# Altium PCB F73-M-V1.0.PcbDoc (part 2 of 2)
Units mm, origin at the board's own origin, x right, y up, seen from the top; angles counter-clockwise.
Board outline 236.42 x 127.48 mm, 3 copper layers (Top Layer, Internal Plane 2, Bottom Layer); 173 components, 127 nets, 549 pads, 601 vias.
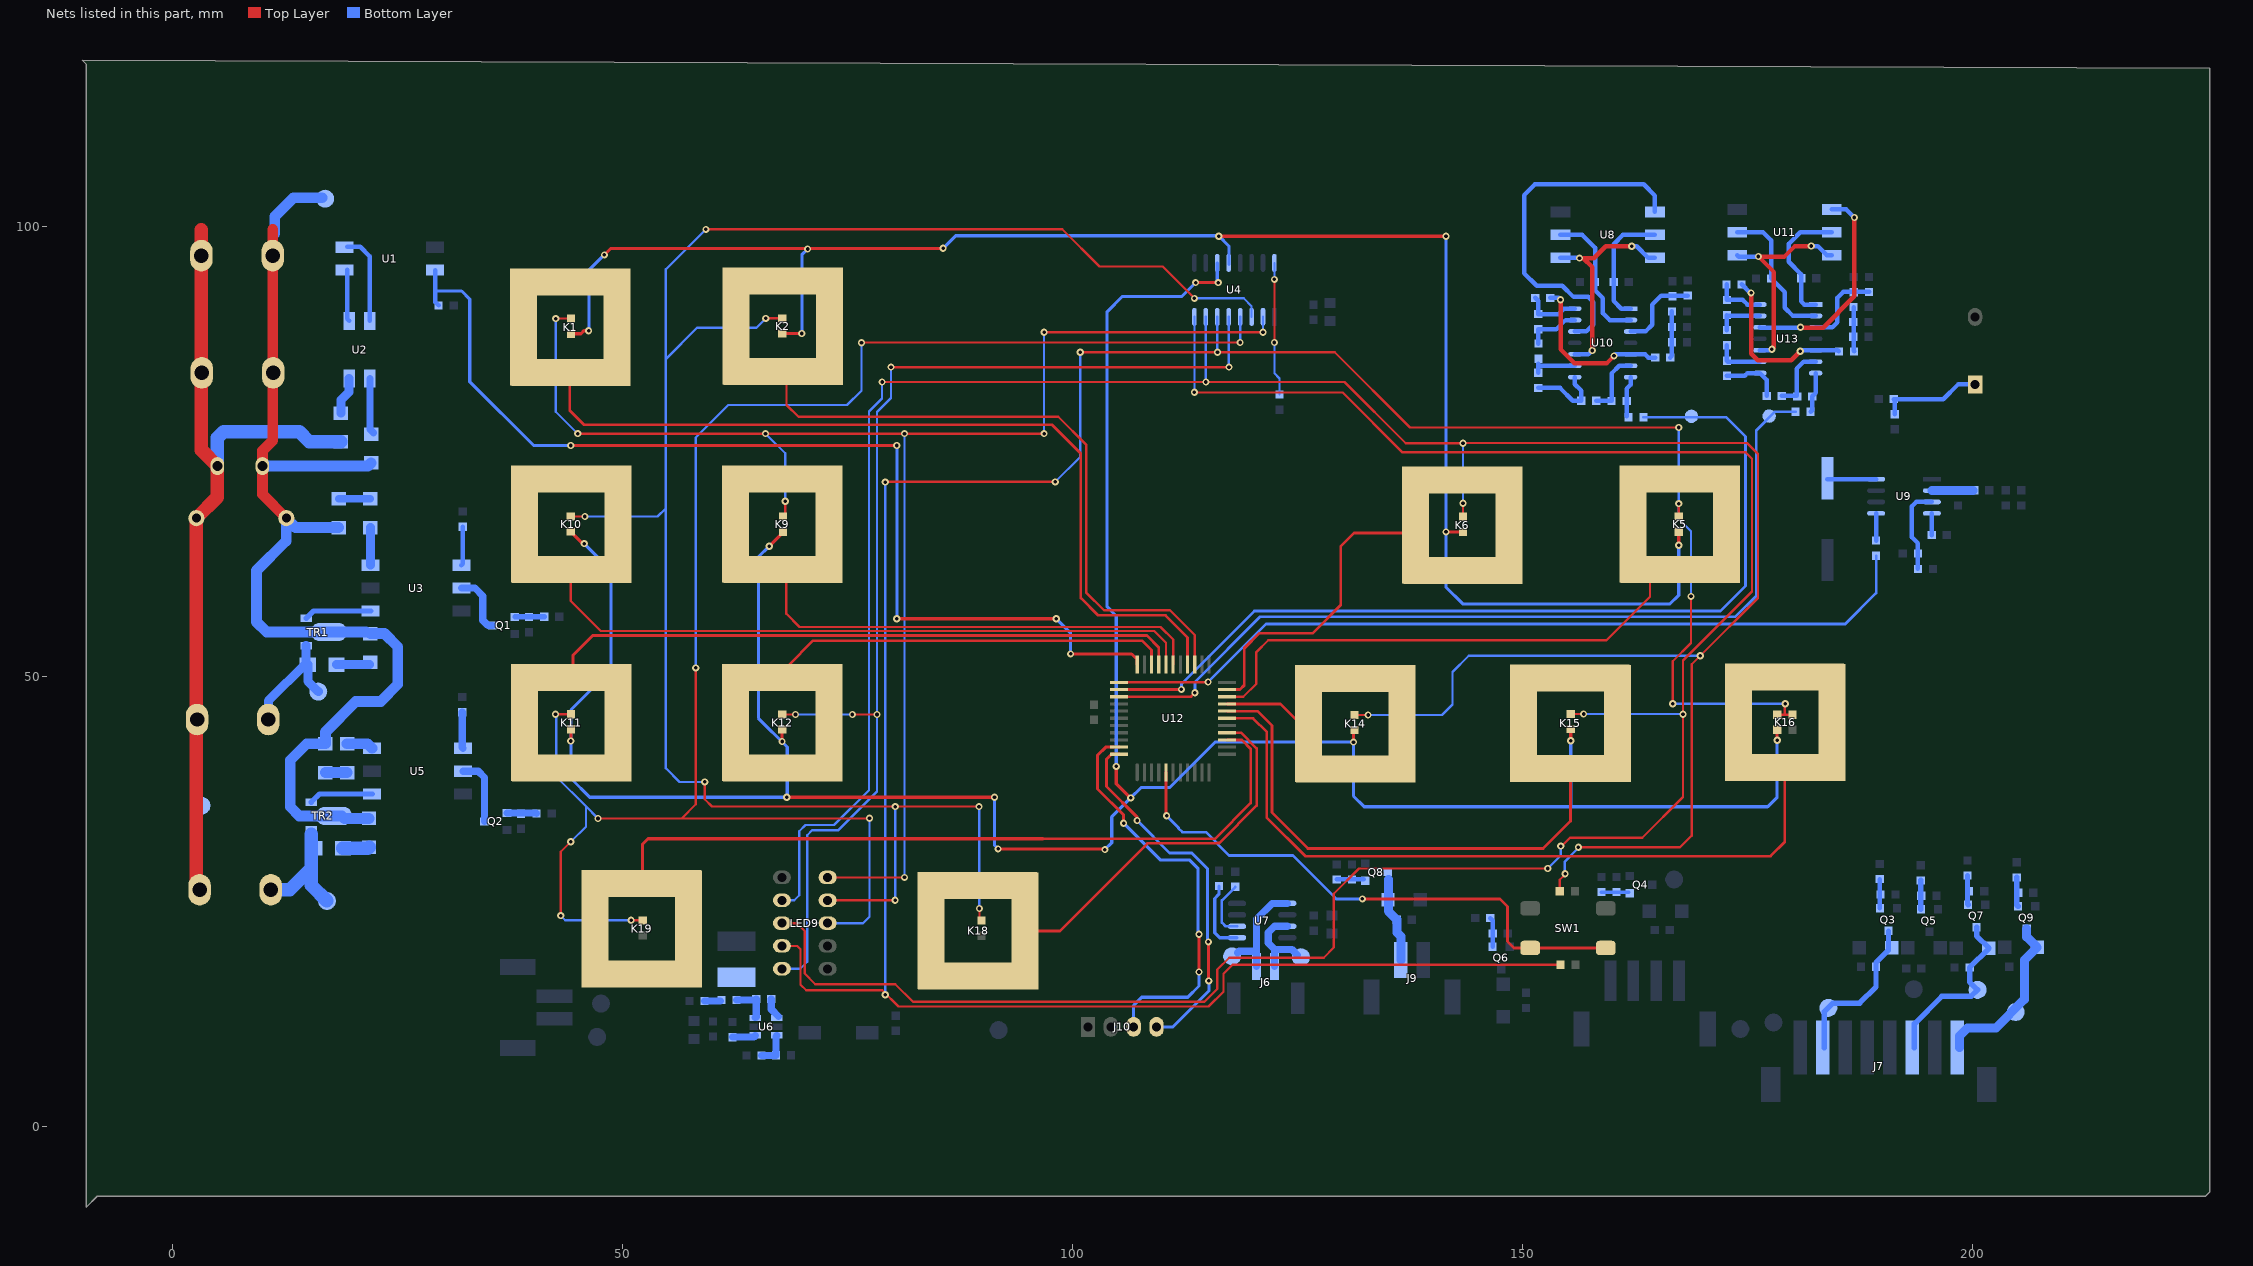
[diagram p3: the nets of this part, all layers, seen from the top]

## Via types
v1: diameter 0.8, hole 0.4, Top Layer to Bottom Layer, tented both sides, 601 vias

## Nets (pads, with @x,y where several pads share a name; then routed paths per layer and width w, separated by ;. In a path a pad name is that pad's centre, name@x,y a point inside that pad or via, vN(x,y) a via of type N, cw(c..) or ccw(c..) an arc to the next point about the centre after c; other vN are vias at no path point) (continued)
GRID4: LED1.2 LED2.2 LED5.2 LED6.2 U4.12 | length 196.2
  Top Layer w0.35: LED1.2@44.257,88.098 45.375,88.098 45.695,88.417 v1(46.228,88.417) ; v1(47.981,96.85) 48.692,97.561 v1@70.561,97.561 ; LED2.2@67.76,88.124 v1(69.915,88.124) ; v1(70.561,97.511) v1@70.561,97.561 ; v1@85.623,97.561 v1@70.561,97.561 ; v1(116.256,98.933) v1(141.529,98.933) ; v1(141.529,66.065) LED6.2@143.408,66.065 ; v1(167.386,64.592) LED5.2@167.386,66.091
  Bottom Layer w0.35: v1@46.279,88.417 46.279,95.199 v1@47.955,96.876 ; v1@69.926,88.124 69.926,96.876 v1(70.561,97.511) ; v1(85.623,97.587) 87.02,98.984 116.256,98.984 117.409,97.83 U4.12@117.409,95.82 ; v1(141.529,98.933) 141.529,59.919 143.383,58.064 166.421,58.064 167.386,59.03 v1(167.386,64.592)
GRID5: LED10.2 LED11.2 LED12.2 LED13.2 LED15.2 LED16.2 LED17.2 U4.11 | length 312.5
  Top Layer w0.35: LED11.2@44.232,66.102 45.564,64.77 v1(45.745,64.77) ; v1@44.257,42.824 LED12.2@44.257,44.131 ; v1(66.294,64.465) 67.818,65.989 LED10.2@67.818,66.091 ; v1(67.735,42.774) LED13.2@67.735,44.105 ; v1(68.25,36.576) v1(91.338,36.576) ; v1(91.745,30.836) 103.48,30.836 v1@103.607,30.709 ; v1(104.877,40.005) 104.877,38.075 106.477,36.474 v1(106.477,36.5) ; v1(113.69,93.777) v1(116.205,93.777) ; v1@131.242,42.875 131.242,43.942 LED15.2@131.343,44.044 ; v1(155.397,42.85) LED16.2@155.397,44.145 ; v1(178.333,42.901) LED17.2@178.333,44.069
  Bottom Layer w0.35: v1(45.745,64.77) 48.717,61.798 48.717,50.724 44.272,46.279 44.272,38.659 46.355,36.576 v1(68.25,36.576) ; v1(66.294,64.465) 65.1,63.271 65.1,45.364 68.301,42.164 v1@68.301,36.424 ; v1(91.338,36.576) 91.338,31.242 v1(91.745,30.836) ; v1(103.607,30.759) 104.369,31.521 104.369,34.392 v1(106.477,36.5) 107.62,37.643 110.795,37.643 115.849,42.697 v1(131.242,42.697) 131.242,36.703 132.436,35.509 151.232,35.509 ; v1(104.877,40.005) 104.877,56.718 103.861,57.734 103.861,90.551 105.537,92.227 112.152,92.227 v1@113.734,93.81 ; v1@116.103,93.878 U4.11@116.103,95.967 ; v1(155.397,42.85) 155.397,35.636 155.27,35.509 151.232,35.509 ; v1(178.333,42.901) 178.333,36.576 177.267,35.509 151.232,35.509
  other v1: 44.247,42.824
IR: R25.1 U12.34 | length 92.5
  Top Layer w0.3: U12.34@105.198,49.346 115.107,49.346 v1(115.076,49.378)
  Bottom Layer w0.3: v1(115.076,49.378) 121.527,55.829 185.903,55.829 189.332,59.258 R25.1@189.332,63.424
ISP_CK: J10.4 U12.44 | length 41
  Top Layer w0.35: U12.44@105.198,41.346 104.338,41.346 103.784,40.792 103.784,37.77 107.188,34.366 v1(107.188,33.985) ; v1(115.113,20.498) 115.138,20.472 v1@115.138,16.154
  Bottom Layer w0.35: v1(107.188,33.985) 110.795,30.378 113.259,30.378 115.011,28.626 v1@115.011,20.498 ; J10.4@109.347,11.049 111.176,11.049 115.164,15.037 v1(115.164,16.154)
ISP_DA: J10.3 U12.43 | length 45.6
  Top Layer w0.35: U12.43@105.198,42.146 103.69,42.146 102.794,41.25 102.794,37.49 105.689,34.595 v1(105.689,33.68) ; v1@114.071,17.094 v1(114.071,21.336)
  Bottom Layer w0.35: v1(105.689,33.68) 109.753,29.616 112.979,29.616 113.97,28.626 113.97,21.336 v1(114.071,21.336) ; J10.3@106.807,11.049 106.807,13.437 107.709,14.338 112.814,14.338 114.071,15.596 v1(114.071,17.145)
K1: K1.2 U12.26 | length 94.7
  Top Layer w0.3: K1.2@44.142,82.782 44.142,79.531 45.695,77.978 97.714,77.978 100.94,74.752 100.94,58.725 102.87,56.794 110.338,56.794 112.799,54.333 U12.26@112.799,51.346
K2: K2.2 U12.25 | length 71.6
  Top Layer w0.254: K2.2@68.232,82.91 68.232,80.181 69.545,78.867 98.425,78.867 101.524,75.768 101.524,59.329 103.499,57.353 110.846,57.353 113.599,54.6 U12.25@113.599,51.346
K5: K5.2 U12.20 | length 55.7
  Top Layer w0.254: U12.20@117.199,47.746 118.993,47.746 120.447,49.2 120.447,52.705 121.768,54.026 159.36,54.026 164.193,58.859 K5.2@164.193,60.889
K6: K6.2 U12.21 | length 33.5
  Top Layer w0.3: U12.21@117.199,48.546 118.625,48.546 119.101,49.022 119.101,53.137 120.777,54.813 126.721,54.813 129.819,57.912 129.819,64.465 131.297,65.943 K6.2@137.25,65.943
K9: K9.2 U12.28 | length 50.9
  Top Layer w0.254: K9.2@68.206,60.889 68.206,56.965 69.672,55.499 109.804,55.499 111.199,54.105 U12.28@111.199,51.346
K10: K10.2 U12.29 | length 73
  Top Layer w0.254: K10.2@44.229,60.889 44.229,58.387 47.574,55.042 109.093,55.042 110.399,53.736 U12.29@110.399,51.346
K11: K11.2 U12.30 | length 71.9
  Top Layer w0.3: K11.2@44.483,48.893 44.483,52.357 46.685,54.559 108.28,54.559 109.599,53.241 U12.30@109.599,51.346
K12: K12.2 U12.31 | length 45.9
  Top Layer w0.3: K12.2@68.435,48.893 68.435,51.239 71.171,53.975 107.747,53.975 108.799,52.923 U12.31@108.799,51.346
K14: K14.2 U12.19 | length 10.2
  Top Layer w0.3: U12.19@117.199,46.946 121.583,46.946 123.125,46.946 K14.2@126.15,43.921
K15: K15.2 U12.18 | length 56.4
  Top Layer w0.3: U12.18@117.199,46.146 120.579,46.146 122.174,44.552 122.174,34.874 126.162,30.886 152.324,30.886 155.354,33.916 K15.2@155.354,38.918
K16: K16.2 U12.17 | length 81.8
  Top Layer w0.3: U12.17@117.199,45.346 120.084,45.346 121.615,43.815 121.615,34.29 125.882,30.023 177.597,30.023 179.179,31.605 K16.2@179.179,38.892
K18: K18.2 U12.15 | length 41.9
  Top Layer w0.3: K18.2@94.713,21.714 98.6,21.714 108.339,31.453 116.031,31.453 116.074,31.496 116.332,31.496 120.472,35.636 120.472,42.012 118.738,43.746 U12.15@117.199,43.746
K19: K19.2 U12.14 | length 82.9
  Top Layer w0.3: 96.749,31.953 115.824,31.953 119.812,35.941 119.812,41.961 118.826,42.946 U12.14@117.199,42.946
  Top Layer w0.35: K19.2@52.2,26.997 52.2,31.321 52.832,31.953 96.749,31.953
L: J1.1 J2.2 pad.4 R3.2 R4.2 R13.2 R66.1 R67.1 TC1.2 TR1.2 TR2.2 VDR1.1 | length 124.2
  Top Layer w1.2: 11.108,99.67 J2.2@11.108,96.776 11.108,76.233 9.968,75.093 VDR1.1@9.968,73.381 9.968,70.242 TC1.2@12.62,67.589
  Bottom Layer w1.2: VDR1.1@9.968,73.381 21.691,73.381 R3.2@22.047,73.737 ; 11.328,99.238 11.328,101.117 13.411,103.2 pad.4@16.586,103.2 ; R4.2@18.44,66.548 13.661,66.548 TC1.2@12.62,67.589 12.62,65.071 9.322,61.773 9.322,56.058 10.439,54.94 TR1.2@14.834,54.94 17.371,54.94 TR1.2@17.374,54.938 R66.1@21.452,54.938 ; R67.1@21.819,34.214 19.075,34.214 18.796,34.493 TR2.2@15.392,34.493 14.072,34.493 13.056,35.509 13.056,40.691 14.884,42.519 R13.2@16.967,42.519 16.967,43.84 20.345,47.219 23.114,47.219 25.019,49.124 25.019,53.289 23.546,54.762 R66.1@21.971,54.762
LEFT: C19.2 D5.1 J7.6 pad.16@200.609,15.164 Q7.C | length 20
  Bottom Layer w0.6: J7.6@193.577,8.738 193.577,11.382 196.647,14.453 199.898,14.453 pad.16@200.609,15.164 199.731,16.042 C19.2@199.731,17.655 201.854,19.778 D5.1@201.854,19.812 200.508,21.158 Q7.C@200.508,22.143
LEG: C16.2 D1.1 J7.2 pad.16@184.023,13.157 Q3.C | length 17.7
  Bottom Layer w0.6: J7.2@183.577,8.738 183.577,12.736 184.531,13.691 187.503,13.691 189.317,15.505 C16.2@189.317,17.731 189.317,18.197 190.703,19.583 Q3.C@190.703,21.712
N: J1.2 J2.1 J3.2 J4.2 pad.3 R1.2 TC1.1 VDR1.2 | length 92.8
  Top Layer w1.5: J4.2@2.985,26.291 2.62,26.655 TC1.1@2.62,67.589 4.968,69.937 VDR1.2@4.968,73.381 3.188,75.16 3.188,99.644
  Bottom Layer w1.5: VDR1.2@4.968,73.381 4.968,76.519 5.664,77.216 14.046,77.216 15.189,76.073 R1.2@18.694,76.073
NetBUZZ1_2: BUZZ1.2 R18.1 R21.1 | length 11.4
  Bottom Layer w0.5: R21.1@191.4,79.148 191.4,80.723 R18.1@191.298,80.824 196.801,80.824 198.434,82.458 BUZZ1.2@200.33,82.458
NetC5_1: C5.1 U6.1 | length 2.3
  Bottom Layer w0.8: C5.1@66.533,14.149 66.533,13.015 U6.1@67.335,12.213
NetC5_2: C5.2 L1.1 R24.2 U6.6 | length 4.3
  Bottom Layer w0.8: R24.2@62.672,14.048 64.755,14.048 C5.2@64.857,14.149 64.857,12.184 U6.6@64.749,12.076
NetC6_1: C6.1 R23.2 U9.3 | length 9.6
  Bottom Layer w0.5: R23.2@193.98,61.951 C6.1@193.98,63.652 193.98,64.821 193.319,65.481 193.319,68.91 193.802,69.393 U9.3@195.529,69.393
NetC7_2: C7.2 R24.1 | length 1.8
  Bottom Layer w0.8: C7.2@59.116,13.921 R24.1@60.869,13.921
NetC11_2: C11.2 L2.2 U9.2 | length 4.6
  Bottom Layer w1: U9.2@195.529,70.663 C11.2@200.101,70.663
NetC12_2: C12.2 U8.2 U10.1 | length 13.6
  Bottom Layer w0.5: U10.1@162.037,90.883 161.009,90.883 160.158,91.734 C12.2@160.158,93.829 160.158,98.055 161.188,99.085 U8.2@164.744,99.085
NetC14_1: C14.1 U9.4 | length 2.4
  Bottom Layer w0.5: C14.1@195.504,65.71 195.504,68.097 U9.4@195.529,68.123
NetC15_2: C15.2 R30.2 R34.2 R38.1 | length 5.2
  Bottom Layer w0.5: R34.2@166.457,85.447 166.635,85.625 C15.2@166.635,87.149 R38.1@166.635,88.851 R30.2@166.635,90.578
NetC17_2: C17.2 U11.2 U13.1 | length 14
  Bottom Layer w0.5: U13.1@182.611,91.34 181.354,91.34 181.011,91.683 C17.2@181.011,94.261 181.011,94.681 179.603,96.088 179.603,98.069 180.899,99.365 U11.2@184.404,99.365
NetC20_2: C20.2 D7.1 J9.1 Q8.C | length 9.5
  Bottom Layer w1: 135.113,27.403 135.113,23.903 C20.2@136.053,22.963 136.053,21.559 136.505,21.107 J9.1@136.505,18.485
NetC25_2: C25.2 R51.2 R54.2 R58.1 | length 4.9
  Bottom Layer w0.5: R51.2@186.828,91.061 186.828,86.184 R54.2@186.878,86.133
NetC26_1: C26.1 R66.2 | length 3.7
  Bottom Layer w1: C26.1@18.212,51.308 R66.2@21.882,51.308
NetC26_2: C26.2 J3.1 pad.6 TR1.1 | length 13.4
  Bottom Layer w1: J3.1@10.625,45.214 10.625,47.278 14.834,51.486 TR1.1@14.834,53.416 ; C26.2@15.012,51.308 15.012,49.479 pad.6@16.18,48.311
NetC27_1: C27.1 R67.2 | length 2.9
  Bottom Layer w1.5: C27.1@18.923,30.886 21.691,30.886 R67.2@21.819,31.014
NetC27_2: C27.2 J4.1 pad.5 TR2.1 | length 13.6
  Bottom Layer w1.5: J4.1@10.905,26.291 13.006,26.291 15.392,28.677 ; 15.392,32.436 15.392,28.677 ; pad.5@17.145,25.044 15.392,26.797 15.392,28.677
NetJ6_1: J6.1 pad.8 U7.5 | length 11.6
  Bottom Layer w0.8: pad.8@118.364,19.279 118.542,19.456 120.474,19.456 ; J6.1@120.474,17.759 120.474,19.456 ; U7.5@123.886,24.767 122.201,24.767 120.474,23.039 120.474,19.456
NetJ6_2: J6.2 pad.9 U7.7 | length 9.3
  Bottom Layer w0.8: J6.2@122.474,17.759 122.474,19.665 ; U7.7@123.886,22.227 122.455,22.227 121.768,21.539 121.768,20.371 122.474,19.665 ; pad.9@124.993,19.05 124.379,19.665 122.474,19.665
NetQ1_B: Q1.B R7.1 R9.2 | length 3.3
  Bottom Layer w0.6: Q1.B@38.04,56.628 41.27,56.628 R9.2@41.286,56.644
NetQ1_C: Q1.C U3.2 | length 6.8
  Bottom Layer w0.8: U3.2@32.091,59.819 33.603,59.819 34.468,58.953 34.468,56.236 35.025,55.678 Q1.C@35.54,55.678
NetQ2_B: Q2.B R15.1 R16.2 | length 3.3
  Bottom Layer w0.8: Q2.B@37.151,34.835 40.386,34.835 R16.2@40.447,34.774
NetQ2_C: Q2.C U5.2 | length 7.6
  Bottom Layer w0.8: U5.2@32.258,39.472 33.96,39.472 34.651,38.781 Q2.C@34.651,33.885
NetQ3_B: Q3.B R27.1 R33.1 | length 3.3
  Bottom Layer w0.5: R33.1@189.738,27.483 189.738,24.227 Q3.B@189.753,24.212
NetQ4_B: Q4.B R32.1 R35.1 | length 3
  Bottom Layer w0.4: R35.1@158.801,26.035 R32.1@160.477,26.035 Q4.B@161.808,26.035
NetQ5_B: Q5.B R40.1 R44.2 | length 3.2
  Bottom Layer w0.6: R44.2@194.285,27.33 194.285,24.125 Q5.B@194.3,24.11
NetQ6_B: Q6.B R42.1 R46.1 | length 3.3
  Bottom Layer w0.5: R46.1@146.442,23.141 146.711,22.872 Q6.B@146.711,19.971
NetQ7_B: Q7.B R50.1 R53.2 | length 3.2
  Bottom Layer w0.6: R53.2@199.492,27.864 199.492,24.709 Q7.B@199.558,24.643
NetQ8_B: Q8.B R55.1 R60.1 | length 3
  Bottom Layer w0.5: R60.1@129.388,27.432 R55.1@131.064,27.432 Q8.B@132.395,27.432
NetQ9_B: Q9.B R61.1 R64.2 | length 3.3
  Bottom Layer w0.6: R64.2@204.953,27.661 204.953,24.608 Q9.B@205.12,24.44
NetR1_1: R1.1 U2.AC2 | length 4.2
  Bottom Layer w1: R1.1@18.694,79.273 18.694,80.721 19.612,81.639 U2.AC2@19.612,83.111
NetR3_1: R3.1 U2.AC1 | length 6.2
  Bottom Layer w0.8: U2.AC1@21.912,83.111 21.912,77.478 R3.1@22.301,77.089
NetR4_1: R4.1 R5.1 | length 3.5
  Bottom Layer w0.8: R4.1@18.44,69.748 R5.1@21.971,69.748
NetR5_2: R5.2 U3.6 | length 4.2
  Bottom Layer w1: U3.6@21.971,62.378 R5.2@21.971,66.548
NetR6_2: R6.2 U3.1 | length 4.4
  Bottom Layer w0.5: U3.1@32.091,62.359 32.243,62.511 R6.2@32.243,66.651
NetR8_2: R8.2 U4.16 | length 14.9
  Top Layer w0.254: v1(122.453,87.122) v1(122.453,94.132)
  Bottom Layer w0.254: v1@122.453,87.198 122.453,83.693 123.023,83.124 R8.2@123.023,81.332 ; v1(122.453,94.132) U4.16@122.453,95.967
NetR12_1: R12.1 R13.1 | length 2.4
  Bottom Layer w1.2: R13.1@16.967,39.319 R12.1@19.38,39.319
NetR12_2: R12.2 U5.6 | length 3
  Bottom Layer w1.2: R12.2@19.38,42.519 21.65,42.519 U5.6@22.158,42.012
NetR14_2: R14.2 U5.1 | length 4
  Bottom Layer w0.8: R14.2@32.182,46.025 32.182,42.088 U5.1@32.258,42.012
NetR17_1: R17.1 R20.2 U6.3 | length 3.8
  Bottom Layer w0.8: R17.1@65.441,7.876 67.016,7.876 R20.2@67.041,7.901 67.041,9.981 U6.3@67.135,10.076
NetR19_2: R19.2 U6.4 | length 2.6
  Bottom Layer w0.8: R19.2@62.215,9.908 64.581,9.908 U6.4@64.749,10.076
NetR22_2: R22.2 U7.2 | length 6.4
  Bottom Layer w0.3: R22.2@118.11,26.619 116.611,25.121 116.611,22.658 117.043,22.227 U7.2@118.298,22.227
NetR25_2: R25.2 U9.5 | length 3
  Bottom Layer w0.5: U9.5@189.329,68.123 189.329,65.103 R25.2@189.332,65.1
NetR26_1: R26.1 R31.1 U10.14 | length 6.3
  Bottom Layer w0.5: R26.1@151.445,92.077 151.776,91.746 R31.1@151.776,90.273 154.027,90.273 154.637,90.883 U10.14@155.837,90.883
NetR26_2: R26.2 R34.1 U10.5 | length 18.4
  Top Layer w0.5: v1(154.254,91.872) 154.254,86.36 155.778,84.836 159.41,84.836 v1(160.198,85.623)
  Bottom Layer w0.5: R26.2@153.122,92.077 154.049,92.077 v1(154.254,91.872) ; v1(160.198,85.623) 160.377,85.803 U10.5@162.037,85.803 163.651,85.803 164.006,85.447 R34.1@164.78,85.447
NetR28_2: R28.2 R36.1 U10.3 | length 9.3
  Bottom Layer w0.5: U10.3@162.037,88.343 163.705,88.343 164.44,89.078 164.44,91.338 165.43,92.329 R28.2@168.402,92.329
NetR29_1: R29.1 U8.5 U10.2 | length 15.5
  Bottom Layer w0.5: U8.5@154.244,99.085 156.642,99.085 158.1,97.627 R29.1@158.1,93.855 158.1,92.903 158.966,92.037 158.966,90.361 159.714,89.613 U10.2@162.037,89.613
NetR31_2: R31.2 R37.1 U10.13 | length 6.1
  Bottom Layer w0.5: R37.1@151.801,86.997 151.801,88.571 R31.2@151.776,88.597 153.799,88.597 154.815,89.613 U10.13@155.837,89.613
NetR37_2: R37.2 R41.2 U10.9 | length 5.1
  Bottom Layer w0.5: R41.2@151.776,83.745 151.776,84.734 151.977,84.533 U10.9@155.837,84.533
NetR39_1: R39.1 R43.2 U10.6 | length 7.2
  Bottom Layer w0.5: R43.2@158.227,80.647 158.253,80.621 R39.1@159.929,80.621 159.929,83.678 160.784,84.533 U10.6@162.037,84.533
NetR39_2: R39.2 R45.2 U10.7 | length 4.5
  Bottom Layer w0.5: R45.2@161.631,78.919 161.631,82.002 162.037,82.408 U10.7@162.037,83.263
NetR41_1: R41.1 R43.1 U10.8 | length 8.3
  Bottom Layer w0.5: R41.1@151.776,82.069 154.202,82.069 155.624,80.647 R43.1@156.551,80.647 156.551,81.777 155.837,82.491 U10.8@155.837,83.263
NetR47_1: R47.1 R52.1 U13.14 | length 5.6
  Bottom Layer w0.5: R47.1@172.705,93.575 172.705,91.899 R52.1@172.756,91.848 174.522,91.848 175.03,91.34 U13.14@176.411,91.34
NetR47_2: R47.2 R54.1 U13.5 | length 18.8
  Top Layer w0.5: v1(175.438,92.634) 175.438,85.877 176.174,85.141 179.883,85.141 v1(180.899,86.157)
  Bottom Layer w0.5: R47.2@174.382,93.575 175.323,92.634 v1(175.438,92.634) ; v1(180.899,86.157) 181.002,86.26 U13.5@182.611,86.26 185.075,86.26 R54.1@185.202,86.133
NetR48_2: R48.2 R56.1 U13.3 | length 9.2
  Bottom Layer w0.5: U13.3@182.611,88.8 184.482,88.8 185.039,89.357 185.039,92.1 185.674,92.735 R48.2@188.544,92.735
NetR49_1: R49.1 U11.5 U13.2 | length 16.1
  Bottom Layer w0.5: U11.5@173.904,99.365 176.759,99.365 177.658,98.465 R49.1@177.658,94.236 179.172,92.722 179.172,90.983 180.084,90.07 U13.2@182.611,90.07
NetR52_2: R52.2 R57.1 U13.13 | length 5.4
  Bottom Layer w0.5: R57.1@172.756,88.495 R52.2@172.756,90.172 172.858,90.07 U13.13@176.411,90.07
NetR57_2: R57.2 R62.2 U13.9 | length 5.4
  Bottom Layer w0.5: R57.2@172.756,86.819 R62.2@172.756,85.092 172.858,84.99 U13.9@176.411,84.99
NetR59_1: R59.1 R63.2 U13.6 | length 7.1
  Bottom Layer w0.5: R63.2@178.852,81.18 180.503,81.18 180.503,84.226 181.267,84.99 U13.6@182.611,84.99
NetR59_2: R59.2 R65.2 U13.7 | length 4.5
  Bottom Layer w0.5: R65.2@182.052,79.427 182.23,79.605 R59.2@182.23,81.129 182.611,81.51 U13.7@182.611,83.72
NetR62_1: R62.1 R63.1 U13.8 | length 6.6
  Bottom Layer w0.5: R62.1@172.756,83.415 174.728,83.415 175.033,83.72 U13.8@176.411,83.72 177.176,82.956 R63.1@177.176,81.18
NetR68_2: R68.2 U7.1 | length 8.1
  Bottom Layer w0.35: R68.2@116.281,26.721 116.281,25.781 115.824,25.324 115.824,21.514 116.381,20.957 U7.1@118.298,20.957
NetTR1_3: TR1.3 U3.4 | length 7.5
  Bottom Layer w0.6: TR1.3@14.834,56.464 15.648,57.279 U3.4@21.991,57.279
NetTR2_3: TR2.3 U5.4 | length 7.1
  Bottom Layer w0.6: TR2.3@15.392,36.017 16.307,36.932 U5.4@22.158,36.932
NetU1_1: U1.1 U2.V+ | length 5.8
  Bottom Layer w0.5: U1.1@19.391,95.226 19.391,89.732 U2.V+@19.612,89.511
NetU1_2: U1.2 U2.V- | length 10.1
  Bottom Layer w0.5: U1.2@19.391,97.766 20.826,97.766 21.912,96.68 U2.V-@21.912,89.511
NetU8_1: U8.1 U8.6 U10.10 | length 24
  Top Layer w0.5: v1(157.785,86.233) 157.785,95.504 156.794,96.495 157.963,96.495 159.283,97.815 v1(162.179,97.815)
  Bottom Layer w0.5: U8.6@154.244,96.545 156.312,96.545 v1(156.362,96.495) ; U10.10@155.837,85.803 157.355,85.803 v1(157.785,86.233) ; v1(162.179,97.815) 162.712,97.815 163.983,96.545 U8.1@164.744,96.545
NetU8_3: U8.3 U10.12 | length 39.9
  Bottom Layer w0.5: U10.12@155.837,88.343 157.126,88.343 157.886,89.103 157.886,91.618 157.328,92.177 155.702,92.177 154.445,93.434 151.6,93.434 150.203,94.831 150.203,103.492 151.409,104.699 163.5,104.699 164.744,103.455 U8.3@164.744,101.625
NetU9_8: U9.8 Y1.1 | length 5.4
  Bottom Layer w0.5: Y1.1@183.921,71.933 U9.8@189.329,71.933
NetU11_1: U11.1 U11.6 U13.10 | length 24
  Top Layer w0.5: v1(177.749,86.36) 177.978,86.589 177.978,94.945 v1(176.251,96.672) 179.146,96.672 180.315,97.841 v1(182.118,97.841)
  Bottom Layer w0.5: U11.6@173.904,96.825 174.081,96.647 176.251,96.647 v1(176.251,96.672) ; U13.10@176.411,86.26 177.649,86.26 v1(177.749,86.36) ; v1(182.118,97.841) 182.855,97.841 183.871,96.825 U11.1@184.404,96.825
NetU11_3: U11.3 U13.12 | length 23.6
  Top Layer w0.5: v1@180.924,88.773 183.439,88.773 186.919,92.253 v1(186.919,101.016)
  Bottom Layer w0.5: U13.12@176.411,88.8 176.438,88.773 180.873,88.773 v1(180.924,88.824) ; U11.3@184.404,101.905 186.03,101.905 v1(186.919,101.016)
P_KEY: SW1.2 U12.5 | length 62.1
  Top Layer w0.3: v1@110.399,34.519 U12.5@110.399,39.346 ; v1(132.232,25.273) 147.523,25.273 148.361,24.435 148.361,20.535 149.073,19.823 SW1.2@150.877,19.823 SW1.2@159.277,19.823
  Bottom Layer w0.3: v1(110.465,34.519) 111.798,33.185 111.798,33.109 112.217,32.69 114.833,32.69 117.424,30.099 124.511,30.099 129.337,25.273 v1(132.232,25.273)
RIGHT: C21.2 D6.1 J7.8 pad.16@204.851,12.7 Q9.C | length 19.1
  Bottom Layer w1: J7.8@198.577,8.738 198.577,10.032 199.466,10.922 202.641,10.922 205.816,14.097 C21.2@205.816,17.729 205.816,18.466 D6.1@207.239,19.888 206.07,21.057 Q9.C@206.07,21.94
S1_AD: pad.18 R65.1 U12.36 | length 99.8
  Top Layer w0.3: U12.36@105.198,47.746 113.177,47.746 v1(113.614,48.184)
  Bottom Layer w0.3: v1(113.614,48.184) 113.614,49.378 120.879,56.642 173.685,56.642 176.009,58.966 176.009,77.356 178.081,79.427 R65.1@180.376,79.427
S2_AD: pad.17 R45.1 U12.35 | length 103.6
  Top Layer w0.3: U12.35@105.198,48.546 112.097,48.546 v1(112.116,48.565)
  Bottom Layer w0.3: v1(112.116,48.565) 112.116,49.174 120.218,57.277 172.034,57.277 174.815,60.058 174.815,76.67 172.669,78.816 R45.1@163.474,78.816
SEGA: LED1.1 LED9.10 LED10.1 U4.2 | length 172.7
  Top Layer w0.254: v1(42.581,89.775) LED1.1@44.257,89.775 ; v1(45.009,76.987) v1(65.888,76.987) v1(81.331,76.987) v1(96.85,76.987) ; LED10.1@67.818,67.793 68.072,68.047 v1(68.072,69.469) ; LED9.10@72.796,27.661 v1(81.331,27.661) ; v1(96.85,88.265) v1(121.183,88.265)
  Bottom Layer w0.254: v1@42.57,89.775 42.57,79.426 v1(45.009,76.987) ; v1(65.888,76.987) 68.072,74.803 v1(68.072,69.469) ; v1(81.331,27.661) v1(81.331,76.987) ; v1(96.85,76.987) v1(96.85,88.265) ; v1(121.183,88.265) U4.2@121.183,89.967
SEGB: LED2.1 LED9.9 LED11.1 LED19.1 U4.3 | length 221
  Top Layer w0.254: LED11.1@44.232,67.778 v1(45.807,67.778) ; v1(59.131,38.278) 59.131,36.347 59.944,35.535 v1(80.315,35.535) v1(89.611,35.535) v1@89.637,35.509 ; v1(59.258,99.695) 98.882,99.695 103.022,95.555 110.033,95.555 v1(113.563,92.024) ; v1(65.924,89.8) LED2.1@67.71,89.8 ; LED9.9@72.796,25.121 v1(80.289,25.121) ; LED19.1@89.662,23.089 v1(89.662,24.206)
  Bottom Layer w0.254: v1(45.807,67.778) 53.884,67.778 54.813,68.707 ; v1(59.131,38.278) 56.337,38.278 54.813,39.802 54.813,68.707 ; v1(59.258,99.695) 54.813,95.25 54.813,85.293 ; v1(65.924,89.8) 64.872,88.748 58.268,88.748 54.813,85.293 ; v1@80.315,25.121 v1(80.315,35.535) ; v1@89.637,24.181 v1@89.637,35.535 ; v1@113.599,91.988 v1(113.563,92.024) 119.05,92.024 119.913,91.161 U4.3@119.913,89.967 ; 54.813,68.707 54.813,85.293
SEGC: LED9.8 LED12.1 LED20.1 U4.4 | length 197.7
  Top Layer w0.254: v1@42.505,45.807 v1(42.545,45.807) LED12.1@44.257,45.807 ; v1(43.129,23.419) 43.129,30.505 v1(44.247,31.623) ; v1(47.269,34.214) 56.566,34.214 ; v1(50.952,22.911) 50.954,22.912 LED20.1@52.233,22.912 ; v1(58.141,50.952) 58.141,35.789 56.566,34.214 ; v1@76.556,87.122 v1(118.643,87.122) ; v1@77.394,34.214 56.566,34.214
  Bottom Layer w0.254: v1@42.621,45.731 42.621,38.862 45.923,35.56 ; v1(43.129,23.419) 43.637,22.911 v1(50.952,22.911) ; v1(44.247,31.623) 45.923,33.299 45.923,35.56 ; v1(47.269,34.214) 45.923,35.56 ; v1(58.141,50.952) 58.141,76.556 61.747,80.162 74.955,80.162 76.556,81.763 v1@76.556,87.122 ; LED9.8@72.796,22.581 76.733,22.581 77.445,23.292 v1(77.445,34.239) ; v1(118.643,87.122) U4.4@118.643,89.967
  other v1: 76.556,87.097
SEGD: LED9.5 LED13.1 U4.5 | length 128.6
  Top Layer w0.254: LED13.1@67.735,45.782 v1@69.331,45.782 ; v1(75.54,45.771) v1@78.334,45.771 ; v1@79.807,84.379 v1(79.832,84.379) v1(117.399,84.379)
  Bottom Layer w0.254: LED9.5@67.716,17.501 69.748,17.501 70.536,18.288 70.536,32.36 71.095,32.918 73.99,32.918 78.283,37.211 78.283,79.4 79.832,80.95 v1(79.832,84.379) ; v1(69.215,45.771) v1(75.54,45.771) v1@75.59,45.771 ; v1@117.373,84.48 U4.5@117.373,89.967
  other v1: 78.283,45.771
SEGE: LED5.1 LED9.4 LED17.1 LED22.1 LED24(NC).1 U4.6 | length 308.9
  Top Layer w0.254: LED9.4@67.716,20.041 69.418,20.041 69.783,19.676 69.783,15.739 70.409,15.113 78.867,15.113 80.67,13.31 115.138,13.31 116.789,14.961 116.789,16.943 117.805,17.959 LED22.1@154.265,17.959 ; v1@79.172,71.628 v1(98.095,71.628) ; v1(100.863,86.03) v1(116.129,86.03) 129.159,86.03 137.516,77.673 v1(167.386,77.673) ; v1(166.726,46.965) 166.726,51.689 168.758,53.721 v1(168.758,58.903) ; LED5.1@167.386,67.767 v1(167.386,69.215) ; LED17.1@178.333,45.745 179.184,45.745 ; v1@179.184,46.876 179.184,45.745 ; 180.035,45.745 179.184,45.745
  Bottom Layer w0.254: v1(79.197,14.63) v1(79.197,71.603) ; v1(98.095,71.628) 100.863,74.397 v1(100.863,86.03) ; v1@116.103,86.081 U4.6@116.103,89.967 ; v1(166.726,46.965) v1(179.222,46.965) ; v1(167.386,77.673) v1(167.386,69.215) 167.386,67.513 168.758,66.142 v1(168.758,58.903)
SEGF: LED6.1 LED9.2 LED15.1 LED23.1 U4.7 | length 288.4
  Top Layer w0.254: v1(78.842,82.728) v1(114.833,82.728) 130.251,82.728 137.058,75.921 v1(143.408,75.921) ; LED15.1@131.343,45.72 v1(132.867,45.72) ; LED6.1@143.408,67.742 v1(143.408,69.24) ; v1@143.408,75.946 174.981,75.946 176.2,74.727 176.2,58.725 v1(169.774,52.299) 168.834,51.359 168.834,32.309 167.538,31.013 v1(156.235,31.013) ; LED23.1@154.178,26.137 154.178,26.179 154.178,27.407 v1@154.661,27.889
  Bottom Layer w0.254: LED9.2@67.716,25.121 69.088,25.121 69.647,25.679 69.647,32.791 70.333,33.477 73.508,33.477 77.394,37.363 77.394,79.451 78.842,80.899 v1(78.842,82.728) ; v1(114.833,82.728) U4.7@114.833,89.967 ; v1(132.867,45.72) 141.072,45.72 142.24,46.888 142.24,50.495 144.043,52.299 v1(169.774,52.299) ; v1(143.408,69.24) v1(143.408,75.921) ; v1@154.737,28.067 154.737,29.439 156.235,30.937 v1(156.235,31.013)
  other v1: 154.762,28.067
SEGG: LED9.3 LED16.1 U4.8 | length 248.1
  Top Layer w0.254: LED9.3@67.716,22.581 69.367,22.581 70.237,21.711 70.237,16.987 71.425,15.799 80.315,15.799 82.271,13.843 114.681,13.843 116.103,15.265 116.103,17.424 117.424,18.745 127.94,18.745 129.057,19.863 129.057,25.857 131.851,28.651 v1(152.832,28.651) ; v1@113.487,81.559 130.048,81.559 136.703,74.905 174.828,74.905 175.539,74.193 175.539,59.436 167.869,51.765 167.869,36.601 163.347,32.08 155.321,32.08 v1@154.33,31.09 ; LED16.1@155.397,45.822 v1(156.82,45.822)
  Bottom Layer w0.254: v1@113.563,81.559 U4.8@113.563,89.967 ; v1(152.832,28.651) 154.28,30.099 v1(154.28,31.14) ; v1(156.82,45.822) v1@167.869,45.822
  other v1: 167.869,45.796 113.563,81.585
ZERO: R2.2 U1.4 U12.33 | length 117.7
  Top Layer w0.35: v1(44.247,75.667) v1@80.518,75.667 ; v1(80.467,56.413) v1(98.196,56.413) ; v1(99.797,52.502) 106.578,52.502 107.199,51.882 U12.33@107.199,51.346
  Bottom Layer w0.35: 29.175,92.837 32.106,92.837 33.02,91.923 33.02,82.753 40.107,75.667 v1(44.247,75.667) ; v1@80.518,56.413 v1@80.518,75.667 ; v1(98.196,56.413) 99.797,54.813 v1(99.797,52.502)
  Bottom Layer w0.5: U1.4@29.175,95.174 29.175,92.837 29.175,91.614 R2.2@29.551,91.238
  other v1: 80.467,75.667
pads on no net: LED9.7 U3.3 U3.5 U4.9 U5.3 U5.5 U7.3 U7.4 U8.4 U9.7 U11.4 U12.1 U12.3 U12.13 U12.16 U12.22 U12.23 U12.24 U12.27 U12.32
copper on no net:
  other v1: 80.467,17.526

## Polygon pours and split planes (outlines as drawn)
GND on Top Layer "Top Layer-GND" (solid, remove dead copper, pour order 4): 29.108,111.963 29.108,-1.092 29.845,-1.829 214.274,-1.829 216.535,0.432 216.535,108.814 213.233,112.116
GND on Bottom Layer "Top Layer-GND" (solid, remove dead copper, pour order 6): 25.527,116.23 25.527,-0.965 28.499,-3.937 213.309,-3.937 217.78,0.533 215.011,3.302 215.011,113.259
no net on Internal Plane 2 (split plane): 225.88,117.119 225.88,-7.129 225.747,-7.262 -8.382,-7.262 -8.482,-7.272 -8.577,-7.301 -8.666,-7.348 -8.743,-7.411 -9.116,-7.785 -9.116,117.952

## Keep-outs
Keep-Out Layer:
  circle w0.1: c94.022,104.938 r1.75
  circle w0.1: c206.522,104.938 r1.75
  circle w0.1: c1.572,104.938 r1.75
  circle w0.1: c1.572,4.938 r1.75
  circle w0.1: c206.522,4.938 r1.75
  circle w0.1: c124.022,4.938 r1.75
  lines w0.1: -6.128,2.988 ccw(c-3.128,2.988) -3.128,-0.012 210.972,-0.012 ccw(c210.972,2.988) 213.972,2.988 213.972,107.088 ccw(c210.972,107.088) 210.972,110.088 -3.128,110.088 ccw(c-3.128,107.088) -6.128,107.088 -6.128,2.988
  lines w1.2: 20.676,24.968 25.832,32.131 ; 25.197,92.507 25.197,102.108 ; 27.381,66.065 27.407,35.611

## Other copper
Top Layer:
  rectangle net GND: 101.143,33.02 102.54,35.509
  rectangle net 5V: 82.448,10.211 84.252,11.074
  rectangle net GND: 50.978,9.195 56.261,14.529
  rectangle net GND: 72.339,5.715 75.057,11.608
  rectangle net NetBUZZ1_2: 198.247,80.797 202.057,84.252
  rectangle net N: 0.737,81.534 4.877,100.66
  rectangle net L: 9.195,80.315 13.106,100.686
  rectangle net NetC26_2: 8.865,42.012 12.649,48.133
  rectangle net NetC27_2: 9.119,23.368 12.903,29.337
  rectangle net GND: 85.344,5.613 89.078,12.573
  rectangle net GND: 36.22,31.344 39.726,33.477
  rectangle net GND: 36.17,31.623 39.065,36.779
  rectangle net GND: 95.275,5.74 98.4,12.649
  rectangle net GND: 91.211,5.69 119.482,8.23
  rectangle net GND: 178.613,87.198 180.569,87.935
  rectangle net GND: 158.674,86.919 160.426,89.687
  rectangle net GRID1: 66.599,26.822 68.91,28.499
  rectangle net SEGF: 66.599,24.282 68.91,25.959
  rectangle net SEGG: 66.599,21.742 68.91,23.419
  rectangle net SEGE: 66.599,19.202 68.91,20.879
  rectangle net SEGD: 66.599,16.662 68.91,18.339
  rectangle net GRID1: 71.679,16.662 73.99,18.339
  rectangle net SEGC: 71.679,21.742 73.99,23.419
  rectangle net SEGB: 71.679,24.282 73.99,25.959
  rectangle net SEGA: 71.679,26.822 73.99,28.499
  rectangle net 5V: 100.787,9.83 102.718,12.37
  rectangle net ISP_CK: 108.407,9.83 110.261,12.294
  rectangle net GND: 103.327,9.83 105.258,12.37
  rectangle net ISP_DA: 105.867,9.83 107.798,12.37
  rectangle net GND: 103.327,8.661 105.258,12.37
  rectangle net GND: 198.933,87.833 202.032,91.821
  pour cut-out: 202.921,98.362 202.921,41.237 218.288,41.237 218.186,41.339 218.186,98.362
  region net N: 0.737,81.534 0.737,76.454 4.013,73.177 4.013,70.764 1.346,68.097 1.346,23.876 1.956,23.266 4.191,23.266 4.674,23.749 4.674,67.945 5.766,69.037 5.766,80.645 4.877,81.534
  region net L: 9.195,80.315 9.195,68.453 11.481,66.167 13.157,66.167 14.148,67.158 14.148,68.402 11.659,70.891 11.659,78.867 13.106,80.315
  pour cut-out: 0.102,109.83 29.058,109.83 29.058,-0.025 29.032,0 0,0
  region net 5V: 98.273,33.68 99.746,35.154 99.746,35.433 99.771,35.458 100.101,35.458 100.101,35.179 100.457,34.823 100.457,34.696 98.755,32.995 98.501,32.995 98.196,33.299 98.044,33.401 98.095,33.477 98.184,33.566
  region net 5V: 64.364,23.647 60.757,23.647 60.554,23.444 60.554,21.946 60.757,21.742 61.951,21.742 62.509,21.184 64.262,21.184 64.77,21.692 64.77,23.241
  region net 5V: 62.509,21.184 62.509,13.564 63.297,12.776 71.831,12.776 72.034,12.979 72.034,14.148 71.907,14.275 65.811,14.275 64.77,15.316 64.77,23.241
  pour cut-out: 136.195,73.812 136.195,59.893 136.22,59.868 150.647,59.868 150.647,73.736 150.597,73.787
  pour cut-out: 160.401,73.889 160.401,59.969 160.426,59.944 174.854,59.944 174.854,73.812 174.803,73.863
  pour cut-out: 171.983,52.146 171.983,38.227 172.009,38.202 186.436,38.202 186.436,52.07 186.385,52.121
  pour cut-out: 148.082,51.816 148.082,37.897 148.107,37.871 162.535,37.871 162.535,51.74 162.484,51.791
  pour cut-out: 124.181,51.791 124.181,37.871 124.206,37.846 138.633,37.846 138.633,51.714 138.582,51.765
  pour cut-out: 82.372,28.753 82.372,14.834 82.398,14.808 96.825,14.808 96.825,28.677 96.774,28.727
  pour cut-out: 44.983,29.108 44.983,15.189 45.009,15.164 59.436,15.164 59.436,29.032 59.385,29.083
  pour cut-out: 37.084,51.943 37.084,38.024 37.109,37.998 51.537,37.998 51.537,51.867 51.486,51.918
  pour cut-out: 60.554,51.867 60.554,37.948 60.579,37.922 75.006,37.922 75.006,51.791 74.955,51.841
  pour cut-out: 60.503,73.787 60.503,59.868 60.528,59.842 74.955,59.842 74.955,73.711 74.905,73.762
  pour cut-out: 37.16,73.812 37.16,59.893 37.186,59.868 51.613,59.868 51.613,73.736 51.562,73.787
  pour cut-out: 37.059,95.682 37.059,81.763 37.084,81.737 51.511,81.737 51.511,95.606 51.46,95.656
  pour cut-out: 60.477,95.86 60.477,81.94 60.503,81.915 74.93,81.915 74.93,95.783 74.879,95.834
  pour cut-out: 65.837,30.531 65.837,14.656 65.862,14.63 74.651,14.63 74.651,30.505
Bottom Layer:
  rectangle net GND: 101.473,32.995 102.413,34.671
  rectangle net NetBUZZ1_2: 198.679,80.924 201.752,84.049
  rectangle net NetC27_2: 9.093,22.631 13.132,29.566
  rectangle net NetC26_2: 8.89,42.85 12.319,48.26
  rectangle net N: 3.48,70.587 5.791,77.292
  rectangle net L: 9.119,71.399 11.481,75.108
  rectangle net L: 11.303,64.516 14.046,69.24
  rectangle net GND: 115.545,1.905 119.736,8.255
  rectangle net GND: 36.17,35.763 38.989,36.779
  rectangle net GND: 36.246,31.293 39.7,33.503
  rectangle net GND: 178.562,87.147 180.569,87.909
  rectangle net GND: 158.547,86.893 160.503,89.002
  rectangle net GRID1: 66.599,26.822 68.885,28.499
  rectangle net SEGF: 66.599,24.282 68.885,25.959
  rectangle net SEGG: 66.599,21.742 68.885,23.419
  rectangle net SEGE: 66.599,19.202 68.885,20.879
  rectangle net SEGD: 66.599,16.662 68.885,18.339
  rectangle net GRID1: 71.679,16.662 73.965,18.339
  rectangle net SEGC: 71.679,21.742 73.965,23.419
  rectangle net SEGB: 71.679,24.282 73.965,25.959
  rectangle net SEGA: 71.679,26.822 73.965,28.499
  rectangle net 5V: 100.787,9.804 102.692,12.294
  rectangle net ISP_CK: 108.356,9.855 110.312,12.268
  rectangle net GND: 103.327,9.804 105.232,12.294
  rectangle net ISP_DA: 105.867,9.804 107.772,12.294
  rectangle net GND: 29.058,97.065 30.675,99.93
  rectangle net GND: 37.668,53.645 40.767,55.169
  rectangle net GND: 79.408,12.04 81.661,13.251
  rectangle net GND: 68.783,8.941 73.558,11.913
  rectangle net GND: 56.388,8.382 59.461,9.804
  rectangle net GND: 60.604,8.839 61.087,9.957
  rectangle net GND: 45.288,8.28 48.743,9.982
  rectangle net GND: 46.31,10.181 47.418,11.461
  rectangle net GND: 47.244,10.262 48.031,11.506
  rectangle net GND: 47.549,10.508 48.56,10.973
  rectangle net GND: 47.777,10.82 48.234,11.176
  rectangle net GND: 103.302,9.804 105.232,13.31
  rectangle net GND: 126.009,20.189 130.156,21.59
  rectangle net GND: 125.73,20.65 126.213,21.285
  rectangle net GND: 132.103,11.956 134.655,16.835
  rectangle net GND: 131.597,11.938 133.096,14.478
  rectangle net GND: 148.438,18.847 149.758,23.038
  rectangle net GND: 160.426,27.686 163.043,28.931
  rectangle net GND: 191.465,22.885 192.684,27.229
  rectangle net GND: 196.139,23.038 197.383,27.076
  rectangle net GND: 201.447,23.52 202.54,27.534
  rectangle net GND: 206.807,23.266 208.051,27.178
  rectangle net GND: 191.262,62.484 192.354,64.999
  rectangle net GND: 197.155,64.516 198.171,67.234
  rectangle net GND: 197.231,68.055 199.382,68.961
  rectangle net GND: 194.029,71.958 197.231,72.688
  rectangle net GND: 188.478,86.801 189.436,89.503
  rectangle net GND: 198.679,88.113 201.701,91.796
  rectangle net GND: 190.144,76.149 193.015,77.216
  rectangle net GND: 185.801,94.386 186.842,95.479
  rectangle net GND: 182.937,93.116 183.82,94.011
  rectangle net GND: 168.311,85.725 169.596,88.851
  rectangle net GND: 165.379,94.209 166.37,95.148
  rectangle net GND: 161.773,92.558 163.144,93.624
  rectangle net GND: 155.118,93.855 156.424,95.072
  rectangle net GND: 125.552,91.338 129.845,93.091
  rectangle net GND: 131.013,29.362 133.655,30.404
  region net GND: 101.473,34.671 101.473,35.306 101.702,35.535 102.438,35.535 102.54,35.433 102.54,33.122 102.413,32.995
  pour cut-out: 110.541,8.382 110.846,8.077 110.846,6.375 111.15,6.375 111.481,6.706 111.1,7.087 111.1,9.119
  region net +12V: 138.328,19.406 138.328,12.852 136.271,10.795 136.347,10.719 143.078,10.719 143.18,10.82 143.18,16.307 139.268,20.218 138.684,20.218
  region net GND: 65.999,11.326 72.974,11.481 73.457,10.998 73.457,9.347 73.076,8.966 69.977,8.966 68.428,10.719 66.523,10.719 65.913,10.693
  region net NetC5_1: 66.065,12.014 66.421,11.659 67.793,11.659 67.793,13.995 67.183,14.605 66.065,14.605
  pour cut-out: 202.743,98.489 202.743,41.364 218.11,41.364 218.008,41.466 218.008,98.489
  region net N: 0.813,77.826 3.404,75.235 3.404,70.053 1.321,67.97 1.321,24.003 1.803,23.52 4.115,23.52 4.597,24.003 4.597,67.818 5.791,69.012 5.791,80.569 4.902,81.458 4.902,100.584 4.318,101.168 1.346,101.168 0.813,100.635
  region net L: 9.271,81.585 9.83,81.026 12.598,81.026 13.132,81.559 13.132,100.152 12.548,100.736 9.855,100.736 9.271,100.152
  pour cut-out: 0.102,109.83 29.058,109.83 29.058,-0.025 29.032,0 0,0
  pour cut-out: 37.059,95.69 37.059,81.77 37.084,81.745 51.511,81.745 51.511,95.613 51.46,95.664
  pour cut-out: 60.511,95.869 60.511,81.95 60.536,81.924 74.963,81.924 74.963,95.793 74.913,95.844
  pour cut-out: 37.16,73.822 37.16,59.903 37.186,59.877 51.613,59.877 51.613,73.746 51.562,73.796
  pour cut-out: 60.511,73.796 60.511,59.877 60.536,59.852 74.963,59.852 74.963,73.72 74.913,73.771
  pour cut-out: 160.376,73.914 160.376,59.995 160.401,59.969 174.828,59.969 174.828,73.838 174.777,73.889
  pour cut-out: 37.059,51.902 37.059,37.982 37.084,37.957 51.511,37.957 51.511,51.825 51.46,51.876
  pour cut-out: 60.562,51.876 60.562,37.957 60.587,37.932 75.014,37.932 75.014,51.8 74.963,51.851
  pour cut-out: 124.181,51.791 124.181,37.871 124.206,37.846 138.633,37.846 138.633,51.714 138.582,51.765
  pour cut-out: 148.082,51.816 148.082,37.897 148.107,37.871 162.535,37.871 162.535,51.74 162.484,51.791
  pour cut-out: 171.958,52.146 171.958,38.227 171.983,38.202 186.411,38.202 186.411,52.07 186.36,52.121
  pour cut-out: 44.958,29.108 44.958,15.189 44.983,15.164 59.411,15.164 59.411,29.032 59.36,29.083
  region net +12V: 36.576,17.805 36.576,8.763 36.855,8.484 39.522,8.484 39.522,12.827 40.513,13.818 40.615,13.716 43.409,13.716 44.272,14.58 40.361,18.491 39.268,18.491
  pour cut-out: 82.321,28.778 82.321,14.859 82.347,14.834 96.774,14.834 96.774,28.702 96.723,28.753
  region net NetC5_2: 60.528,17.653 60.528,15.519 61.646,15.519 62.154,15.011 62.154,13.513 63.957,11.709 65.405,11.709 65.405,17.12 64.872,17.653
  region net 5V: 60.554,19.507 60.554,23.47 60.731,23.647 64.44,23.647 64.795,23.292 64.795,19.533 64.77,19.507
  region net 5V: 75.895,9.576 80.442,9.576 80.975,10.109 80.975,11.176 80.772,11.379 78.461,11.379 75.565,14.275 68.809,14.275 68.58,14.046 68.58,12.979 68.758,12.802 74.879,12.802 75.87,11.811 75.87,9.601
  pour cut-out: 113.017,91.25 113.017,88.786 113.347,88.456 122.695,88.456 123.152,88.913 123.05,89.014 123.05,91.275
  pour cut-out: 115.57,97.358 115.57,94.818 115.697,94.691 122.834,94.691 122.987,94.844 122.987,97.13 122.758,97.358
  pour cut-out: 136.195,73.812 136.195,59.893 136.22,59.868 150.647,59.868 150.647,73.736 150.597,73.787
  pour cut-out: 65.837,30.505 65.837,14.63 65.862,14.605 74.651,14.605 74.651,30.48
  region net GND: 54.737,10.744 60.3,10.744 61.087,9.957 61.087,8.839 61.265,8.661 64.11,8.661 64.313,8.458 64.313,6.934 64.618,6.629 64.618,6.071 64.592,6.045 63.068,6.045 62.052,7.061 57.709,7.061 56.388,8.382 48.489,8.382 48.082,8.788 48.082,9.728
  region net GND: 48.743,8.28 57.201,8.28 57.887,8.966 56.109,10.744 48.793,10.744 48.031,11.506 46.223,11.506 45.004,12.725 44.044,12.725 44.044,11.227 45.288,9.982

## Silkscreen, mask and mechanical layers (free items; w line width, h text height)
Top Overlay:
  drawing of 5610 lines, arcs and shapes, not listed
  text "D" at 106.324,14.478 h1.5 r180
  text "C" at 108.89,14.478 h1.5 r180
  text "-" at 104.826,12.624 h2
  text "+" at 102.337,12.598 h2
Bottom Overlay:
  rectangle: 103.251,9.601 107.772,12.471
  text "AB-SENSOR" at 171.831,106.299 h3 r180
  text "FUN-SENSOR" at 152.375,106.121 h3 r180
  text "+" at 42.937,16.943 h2 r180
  text "C" at 109.931,12.979 h1.5
  text "D" at 107.29,12.954 h1.5
  text "-" at 104.826,12.624 h2
  text "+" at 102.337,12.598 h2
  text "-" at 43.089,10.568 h2 r180
  text "F73-M-V1.0" at 90.983,8.839 h3 r180
  text "20251230 BT" at 91.237,5.944 h3 r180
Mechanical 2:
  drawing of 5656 lines, arcs and shapes, not listed
  text "110 (mm)" at -7.315,49.838 h1.52 r90
  text "220 (mm)" at 104.388,-4.914 h1.52

## Text inside footprints (layer, text, board x,y; h text height)
J8: Bottom Overlay "*" at 157.694,16.715 h1.33 r180
LED9: Top Overlay "1" at 65.227,28.321 h1.2; Top Overlay "8" at 71.272,23.978 h3 r180
U2: Bottom Overlay "~" at 22.452,85.151 h0.84 r90; Bottom Overlay "~" at 20.312,85.092 h0.84 r90; Bottom Overlay "-" at 22.192,87.988 h0.84 r90; Bottom Overlay "+" at 20.007,88.064 h0.84 r90